# EAGLE board p8x-cf-card-full (EAGLE 9.6.2)
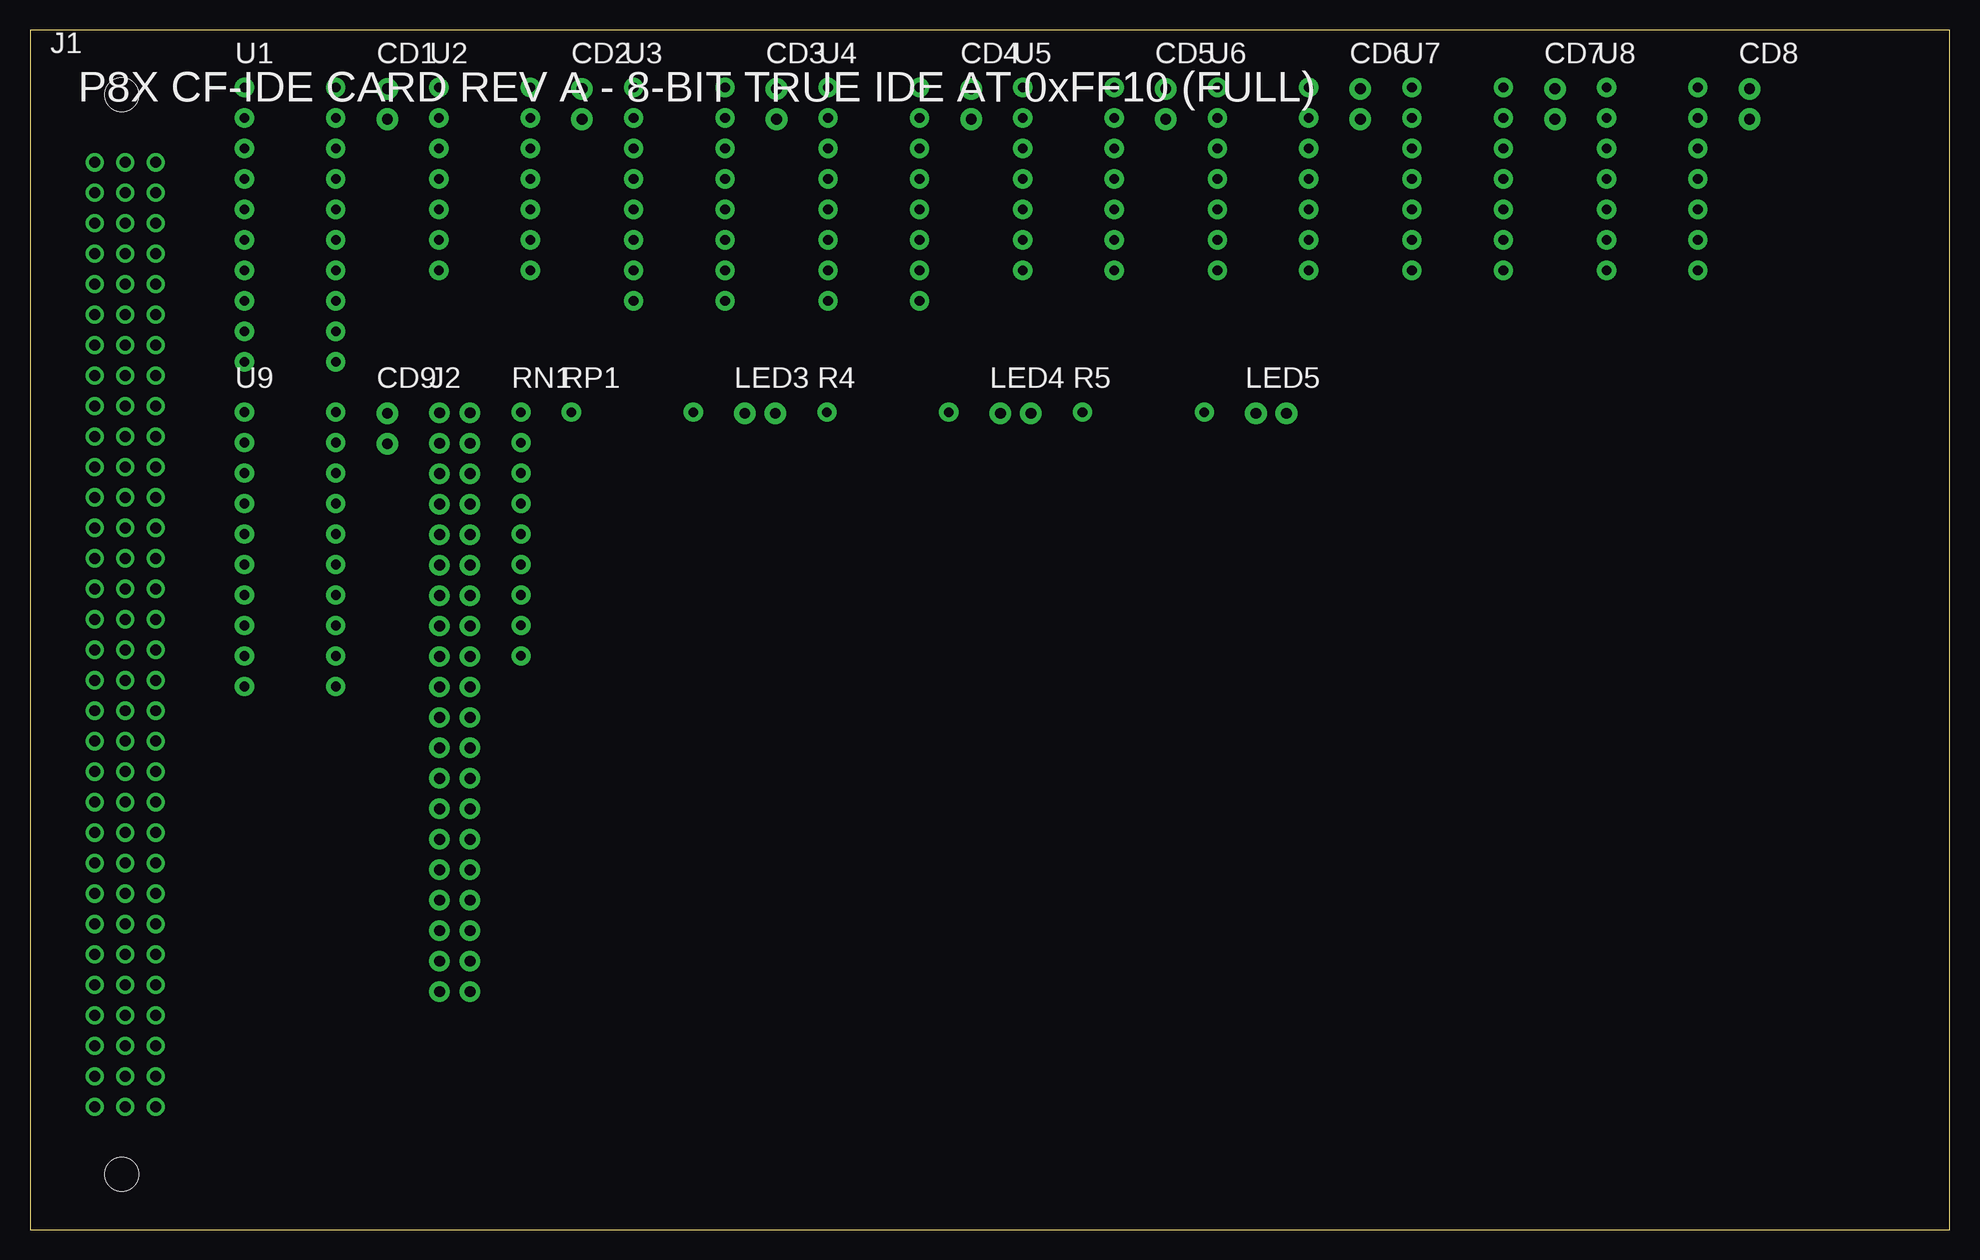
[diagram p0: board, top side]
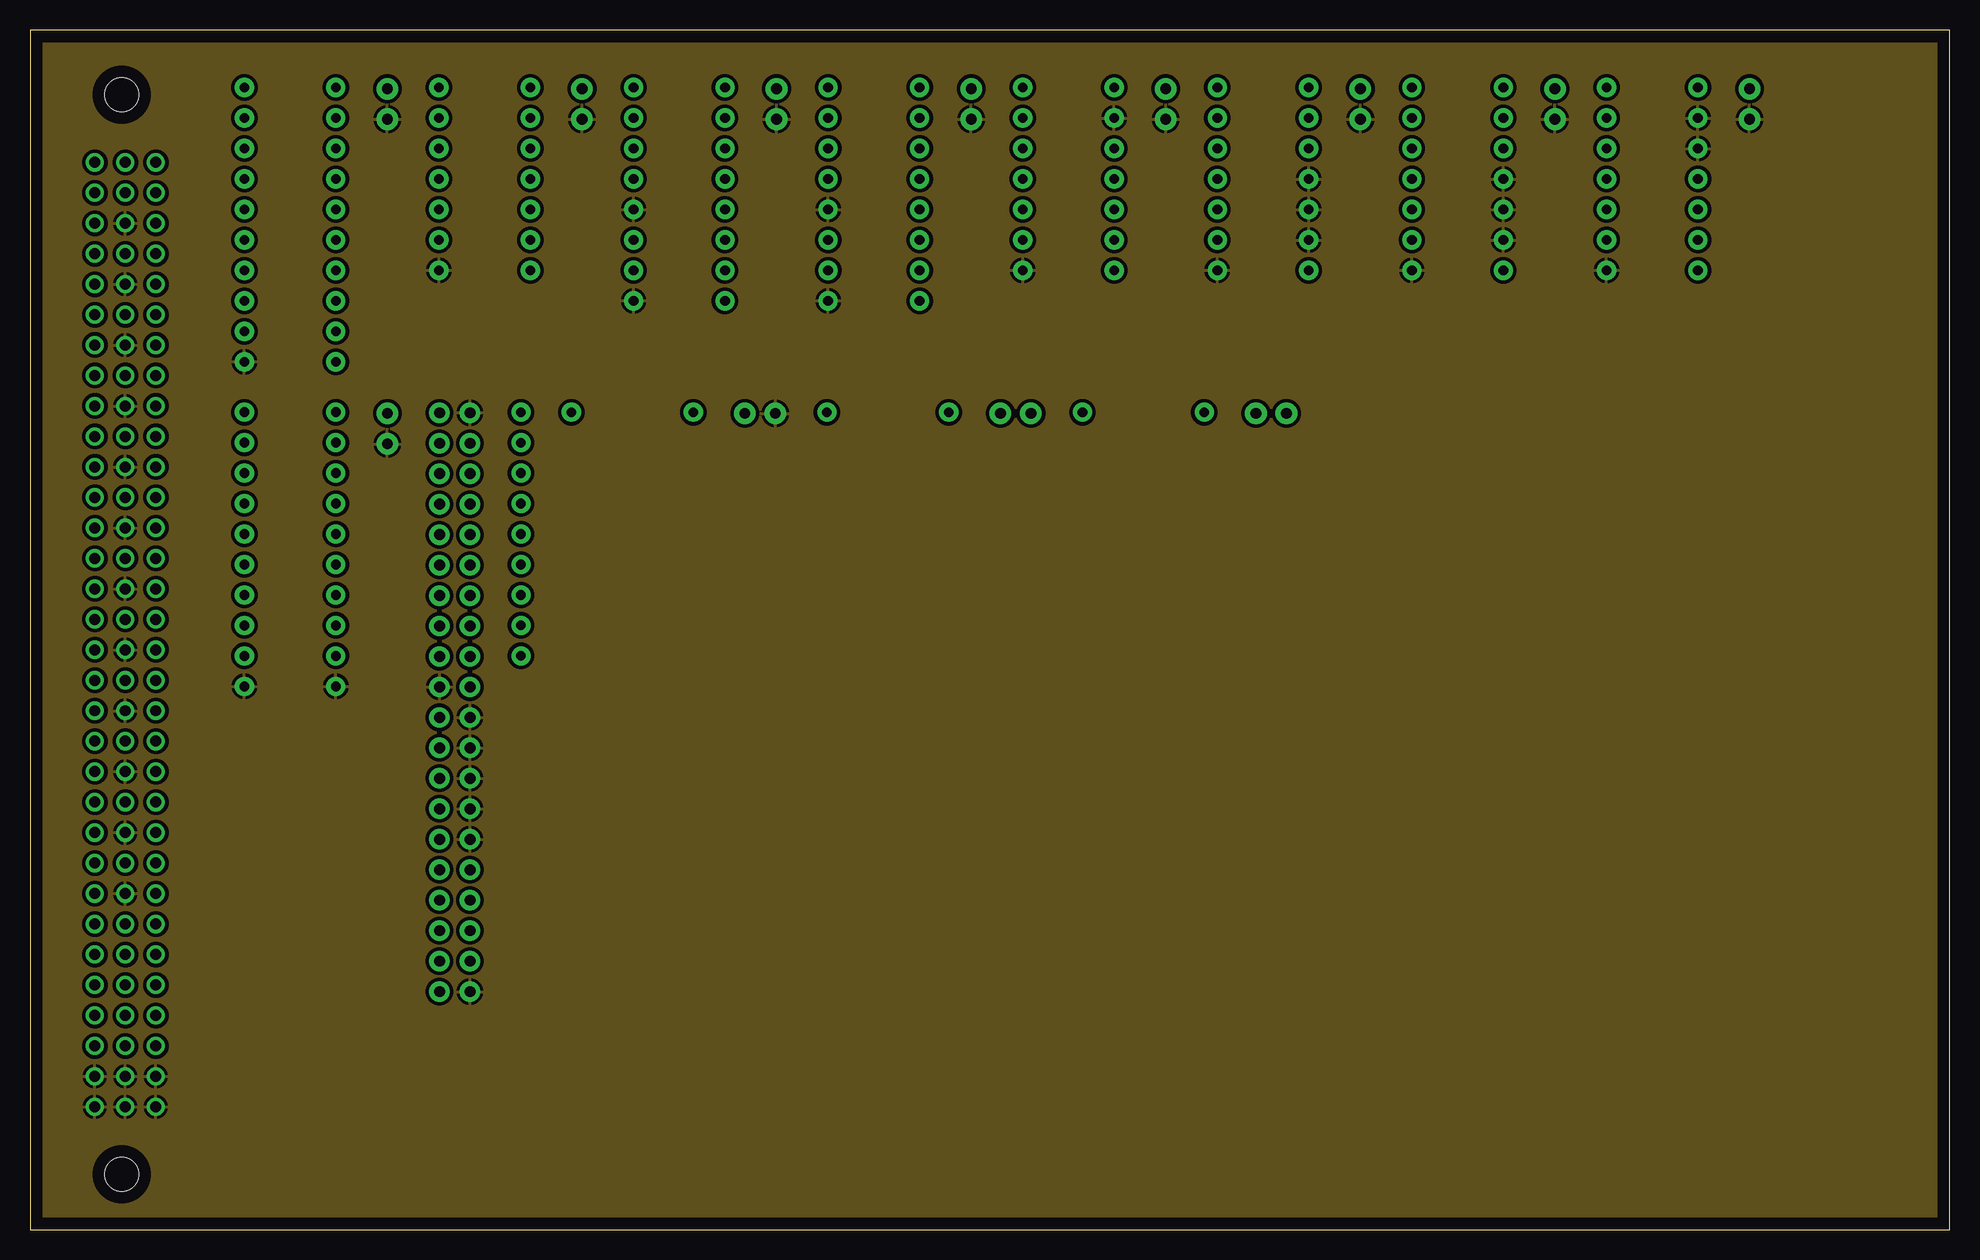
[diagram p1: board, inner layer Route2]
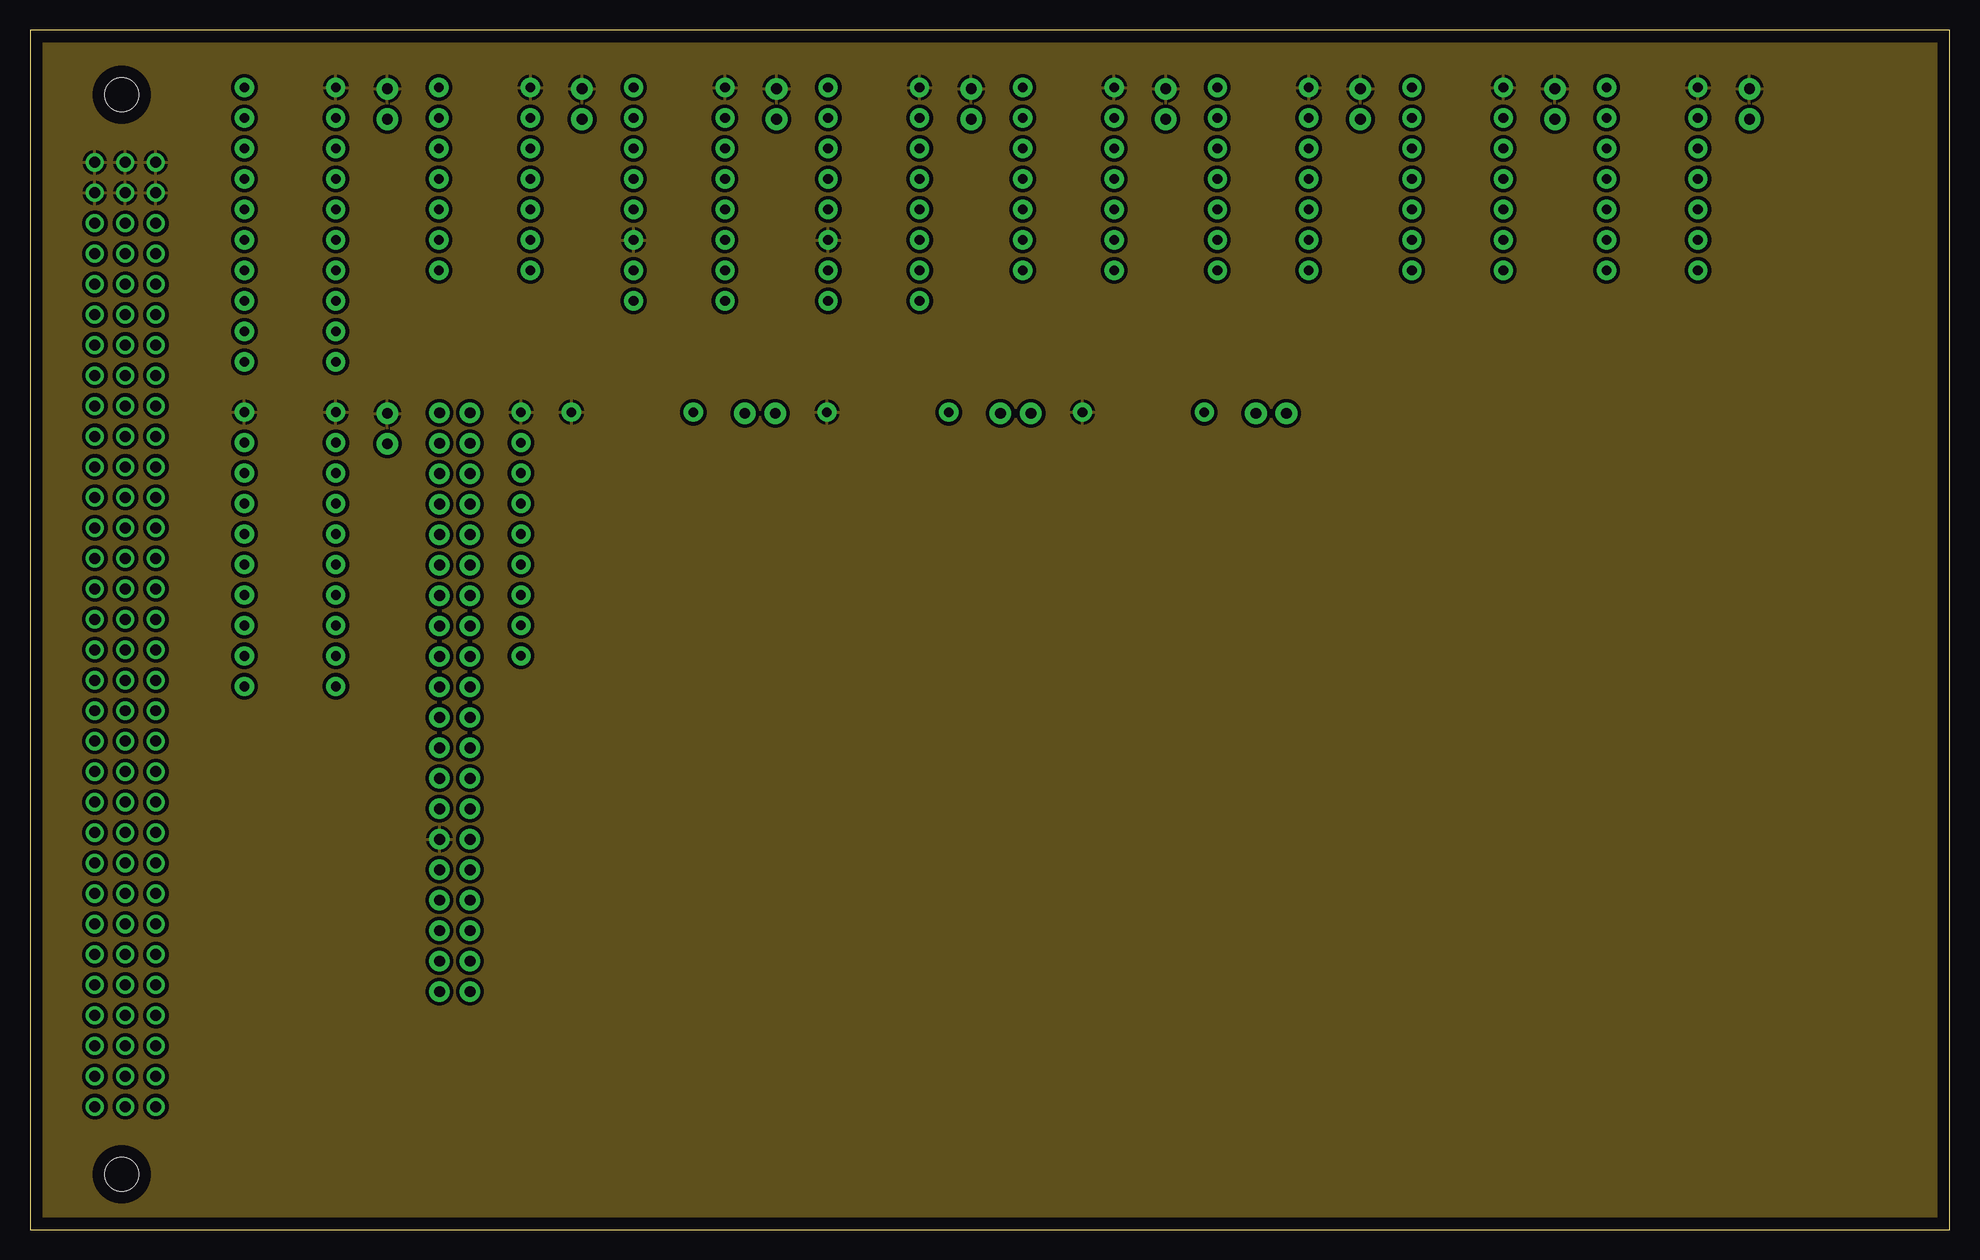
[diagram p2: board, inner layer Route15]

Size 160 x 100 mm. Coordinates in mm from the lower left corner, seen from the top.
Outline: 0,0 160,0 160,100 0,100 0,0
Copper layers (1*2*15*16): Top / Route2 / Route15 / Bottom

## Footprints (pad centres in the part's own frame; a part is rotated, then mirrored left to right if it is on the bottom)
C_DISC1 = drill 0.9 pad 1.8: 1 0,0; 2 0,-2.54
MABC96R = drill 0.914 pad 1.524: A1 -2.54,39.37; A2 -2.54,36.83; A3 -2.54,34.29; A4 -2.54,31.75; A5 -2.54,29.21; A6 -2.54,26.67; A7 -2.54,24.13; A8 -2.54,21.59; A9 -2.54,19.05; A10 -2.54,16.51; A11 -2.54,13.97; A12 -2.54,11.43; A13 -2.54,8.89; A14 -2.54,6.35; A15 -2.54,3.81; A16 -2.54,1.27; A17 -2.54,-1.27; A18 -2.54,-3.81; A19 -2.54,-6.35; A20 -2.54,-8.89; A21 -2.54,-11.43; A22 -2.54,-13.97; A23 -2.54,-16.51; A24 -2.54,-19.05; A25 -2.54,-21.59; A26 -2.54,-24.13; A27 -2.54,-26.67; A28 -2.54,-29.21; A29 -2.54,-31.75; A30 -2.54,-34.29; A31 -2.54,-36.83; A32 -2.54,-39.37; B1 0,39.37; B2 0,36.83; B3 0,34.29; B4 0,31.75; B5 0,29.21; B6 0,26.67; B7 0,24.13; B8 0,21.59; B9 0,19.05; B10 0,16.51; B11 0,13.97; B12 0,11.43; B13 0,8.89; B14 0,6.35; B15 0,3.81; B16 0,1.27; B17 0,-1.27; B18 0,-3.81; B19 0,-6.35; B20 0,-8.89; B21 0,-11.43; B22 0,-13.97; B23 0,-16.51; B24 0,-19.05; B25 0,-21.59; B26 0,-24.13; B27 0,-26.67; B28 0,-29.21; B29 0,-31.75; B30 0,-34.29; B31 0,-36.83; B32 0,-39.37; C1 2.54,39.37; C2 2.54,36.83; C3 2.54,34.29; C4 2.54,31.75; C5 2.54,29.21; C6 2.54,26.67; C7 2.54,24.13; C8 2.54,21.59; C9 2.54,19.05; C10 2.54,16.51; C11 2.54,13.97; C12 2.54,11.43; C13 2.54,8.89; C14 2.54,6.35; C15 2.54,3.81; C16 2.54,1.27; C17 2.54,-1.27; C18 2.54,-3.81; C19 2.54,-6.35; C20 2.54,-8.89; C21 2.54,-11.43; C22 2.54,-13.97; C23 2.54,-16.51; C24 2.54,-19.05; C25 2.54,-21.59; C26 2.54,-24.13; C27 2.54,-26.67; C28 2.54,-29.21; C29 2.54,-31.75; C30 2.54,-34.29; C31 2.54,-36.83; C32 2.54,-39.37 | hole 2.794: -0.3,45; -0.3,-45
HDR40 = drill 0.9 pad 1.7: 1 0,0; 2 2.54,0; 3 0,-2.54; 4 2.54,-2.54; 5 0,-5.08; 6 2.54,-5.08; 7 0,-7.62; 8 2.54,-7.62; 9 0,-10.16; 10 2.54,-10.16; 11 0,-12.7; 12 2.54,-12.7; 13 0,-15.24; 14 2.54,-15.24; 15 0,-17.78; 16 2.54,-17.78; 17 0,-20.32; 18 2.54,-20.32; 19 0,-22.86; 20 2.54,-22.86; 21 0,-25.4; 22 2.54,-25.4; 23 0,-27.94; 24 2.54,-27.94; 25 0,-30.48; 26 2.54,-30.48; 27 0,-33.02; 28 2.54,-33.02; 29 0,-35.56; 30 2.54,-35.56; 31 0,-38.1; 32 2.54,-38.1; 33 0,-40.64; 34 2.54,-40.64; 35 0,-43.18; 36 2.54,-43.18; 37 0,-45.72; 38 2.54,-45.72; 39 0,-48.26; 40 2.54,-48.26
LED5 = drill 0.9 pad 1.8: 1 2.54,0; 2 0,0
R_AXIAL = drill 0.8 pad 1.6: 1 0,0; 2 10.16,0
SIP9 = drill 0.8 pad 1.6: 1 0,0; 2 0,-2.54; 3 0,-5.08; 4 0,-7.62; 5 0,-10.16; 6 0,-12.7; 7 0,-15.24; 8 0,-17.78; 9 0,-20.32
DIP20 = drill 0.813 pad 1.6: 1 0,0; 2 0,-2.54; 3 0,-5.08; 4 0,-7.62; 5 0,-10.16; 6 0,-12.7; 7 0,-15.24; 8 0,-17.78; 9 0,-20.32; 10 0,-22.86; 11 7.62,-22.86; 12 7.62,-20.32; 13 7.62,-17.78; 14 7.62,-15.24; 15 7.62,-12.7; 16 7.62,-10.16; 17 7.62,-7.62; 18 7.62,-5.08; 19 7.62,-2.54; 20 7.62,0
DIP14 = drill 0.813 pad 1.6: 1 0,0; 2 0,-2.54; 3 0,-5.08; 4 0,-7.62; 5 0,-10.16; 6 0,-12.7; 7 0,-15.24; 8 7.62,-15.24; 9 7.62,-12.7; 10 7.62,-10.16; 11 7.62,-7.62; 12 7.62,-5.08; 13 7.62,-2.54; 14 7.62,0
DIP16 = drill 0.813 pad 1.6: 1 0,0; 2 0,-2.54; 3 0,-5.08; 4 0,-7.62; 5 0,-10.16; 6 0,-12.7; 7 0,-15.24; 8 0,-17.78; 9 7.62,-17.78; 10 7.62,-15.24; 11 7.62,-12.7; 12 7.62,-10.16; 13 7.62,-7.62; 14 7.62,-5.08; 15 7.62,-2.54; 16 7.62,0

## Placement (x,y rotation side)
CD1  100nF  [C_DISC1]  29.79,95.1 0 top
CD2  100nF  [C_DISC1]  46.01,95.1 0 top
CD3  100nF  [C_DISC1]  62.23,95.1 0 top
CD4  100nF  [C_DISC1]  78.45,95.1 0 top
CD5  100nF  [C_DISC1]  94.67,95.1 0 top
CD6  100nF  [C_DISC1]  110.89,95.1 0 top
CD7  100nF  [C_DISC1]  127.11,95.1 0 top
CD8  100nF  [C_DISC1]  143.33,95.1 0 top
CD9  100nF  [C_DISC1]  29.79,68.04 0 top
J1  MABC96R  [MABC96R]  7.94,49.6 0 top
J2  IDE-40  [HDR40]  34.14,68.09 0 top
LED3  GRN  [LED5]  59.59,68.04 0 top
LED4  YEL  [LED5]  80.89,68.04 0 top
LED5  GRN  [LED5]  102.19,68.04 0 top
R4  1K  [R_AXIAL]  66.43,68.14 0 top
R5  330R  [R_AXIAL]  87.73,68.14 0 top
RN1  8X10K  [SIP9]  40.93,68.14 0 top
RP1  1K  [R_AXIAL]  45.13,68.14 0 top
U1  74HCT245  [DIP20]  17.87,95.2 0 top
U2  74HCT30  [DIP14]  34.09,95.2 0 top
U3  74HCT138  [DIP16]  50.31,95.2 0 top
U4  74HCT138  [DIP16]  66.53,95.2 0 top
U5  74HCT14  [DIP14]  82.75,95.2 0 top
U6  74HCT10  [DIP14]  98.97,95.2 0 top
U7  74HCT10  [DIP14]  115.19,95.2 0 top
U8  74HCT08  [DIP14]  131.41,95.2 0 top
U9  74HCT374  [DIP20]  17.87,68.14 0 top

## Library data of the parts
CD1-CD9 J1 J2 LED3-LED5 R4 R5 RN1 RP1 U1-U9 = p8x

## Nets
-CFOE: U1.19 U8.6 U8.9 U8.10
-CFSEL: U5.11 U8.3
-CS0: J2.37 U6.12 U8.1
-CS1: J2.38 U6.6 U8.2
-DASP: J2.39 LED5.1 RN1.4
-IOR: J2.25 U1.1 U7.12 U8.4
-IOW: J2.23 U7.6 U8.5
-MEMW: U4.7 U5.5
-PDIAG: J2.34 RN1.3
-RD: U3.7 U5.3
-RES: J1.A11 J2.1
A0: J1.C3 J2.35
A1: J1.C4 J2.33
A2: J1.C5 J2.36
A3: J1.C6 U5.9 U6.5
A3N: U5.8 U6.13
A4: J1.C7 U6.2 U6.4
A8: J1.C11 U2.1
A9: J1.C12 U2.2
A10: J1.C13 U2.3
A11: J1.C14 U2.4
A12: J1.C15 U2.5
A13: J1.C16 U2.6
A14: J1.C17 U2.11
A15: J1.C18 U2.12
ACTK: LED4.1 U8.8
CFD0: J2.17 U1.18
CFD1: J2.15 U1.17
CFD2: J2.13 U1.16
CFD3: J2.11 U1.15
CFD4: J2.9 U1.14
CFD5: J2.7 U1.13
CFD6: J2.5 U1.12
CFD7: J2.3 U1.11
CFD8: J2.4 U9.3
CFD9: J2.6 U9.4
CFD10: J2.8 U9.7
CFD11: J2.10 U9.8
CFD12: J2.12 U9.13
CFD13: J2.14 U9.14
CFD14: J2.16 U9.17
CFD15: J2.18 U9.18
CLKB: J1.A25 U7.5 U7.13
D0: J1.A3 U1.2
D1: J1.A4 U1.3
D2: J1.A5 U1.4
D3: J1.A6 U1.5
D4: J1.A7 U1.6
D5: J1.A8 U1.7
D6: J1.A9 U1.8
D7: J1.A10 U1.9
DLD0: J1.A16 U4.1
DLD1: J1.A17 U4.2
DLD2: J1.A18 U4.3
DLD3: J1.A19 U4.4
DOE0: J1.A12 U3.1
DOE1: J1.A13 U3.2
DOE2: J1.A14 U3.3
DOE3: J1.A15 U3.4
GND: CD1.2 CD2.2 CD3.2 CD4.2 CD5.2 CD6.2 CD7.2 CD8.2 CD9.2 J1.A31 J1.A32 J1.B3 J1.B5 J1.B7 J1.B9 J1.B11 J1.B13 J1.B15 J1.B17 J1.B19 J1.B21 J1.B23 J1.B25 J1.B31 J1.B32 J1.C31 J1.C32 J2.2 J2.19 J2.22 J2.24 J2.26 J2.28 J2.30 J2.40 LED3.1 U1.10 U2.7 U3.5 U3.8 U4.5 U4.8 U5.7 U5.13 U6.7 U6.9 U6.10 U6.11 U7.7 U7.9 U7.10 U7.11 U8.7 U8.12 U8.13 U9.10 U9.11
IOPG: U2.8 U5.1
IOPGP: U5.2 U6.1 U6.3
IORDY: J2.27 RN1.2
LEDAC: LED4.2 R4.2
LEDDA: LED5.2 R5.2
LEDP: LED3.2 RP1.2
RDP: U5.4 U7.2
SELP: U5.10 U7.1 U7.3
VCC: CD1.1 CD2.1 CD3.1 CD4.1 CD5.1 CD6.1 CD7.1 CD8.1 CD9.1 J1.A1 J1.A2 J1.B1 J1.B2 J1.C1 J1.C2 J2.29 R4.1 R5.1 RN1.1 RP1.1 U1.20 U2.14 U3.6 U3.16 U4.6 U4.16 U5.14 U6.14 U7.14 U8.14 U9.1 U9.20
WRP: U5.6 U7.4

## Tracks (layer width: path | path; a pad name or v marks a point on that pad's centre or on a via)
GND
  pour Route2 (isolate 0.3): 0,0 160,0 160,100 0,100
VCC
  pour Route15 (isolate 0.3): 0,0 160,0 160,100 0,100

## Text on the board
tPlace: P8X CF-IDE CARD REV A - 8-BIT TRUE IDE AT 0xFF10 (FULL)